# Altium PCB Carrier with Power Supply.PcbDoc (part 4 of 4)
Units mm, origin at the board's own origin, x right, y up, seen from the top; angles counter-clockwise.
Board outline 756.27 x 168 mm, 6 copper layers (Top Layer, Signal Layer 2, Signal Layer 1, VCC, GND, Bottom Layer), stack 1.551 mm thick; 145 components, 326 nets, 1962 pads, 760 vias.
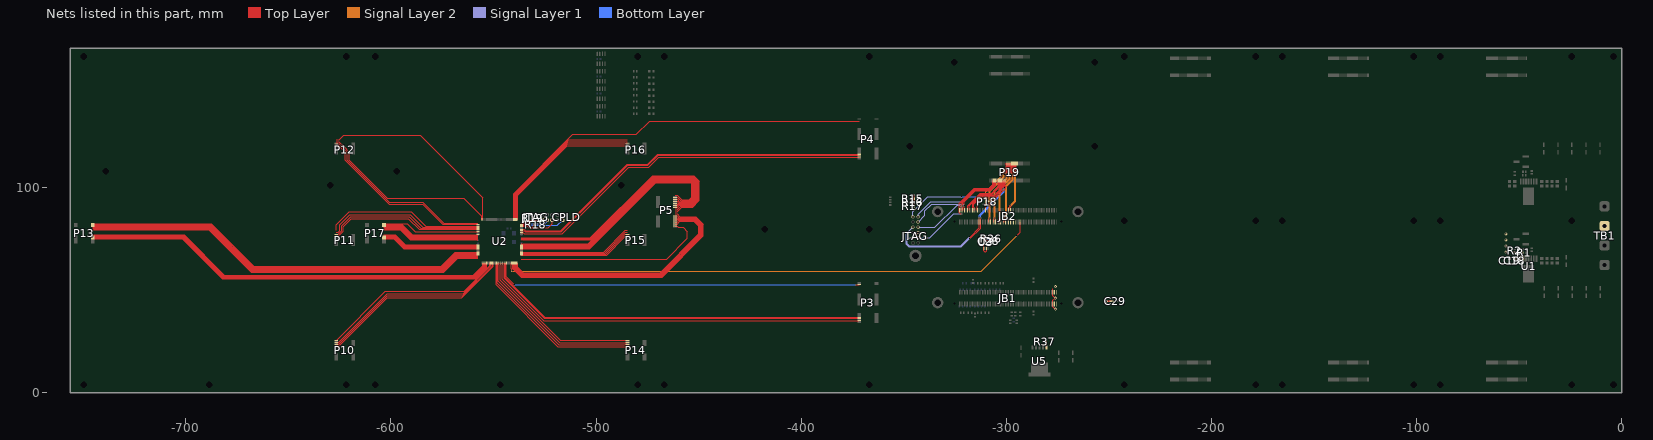
[diagram p8: the nets of this part, all layers, seen from the top]

## Via types
v1: diameter 0.5, hole 0.3, Top Layer to Bottom Layer, 213 vias
v2: diameter 0.9, hole 0.5, Top Layer to Bottom Layer, 182 vias
v3: diameter 0.7, hole 0.3, Top Layer to Bottom Layer, 112 vias
v4: diameter 1.1, hole 0.7, Top Layer to Bottom Layer, 84 vias
v5: diameter 1.5, hole 0.7, Top Layer to Bottom Layer, 59 vias
v6: diameter 1.7, hole 0.7, Top Layer to Bottom Layer, 58 vias
v7: diameter 0.8, hole 0.3, Top Layer to Bottom Layer, 36 vias
v8: diameter 0.9, hole 0.3, Top Layer to Bottom Layer, 6 vias
v9: diameter 1, hole 0.5, Top Layer to Bottom Layer, 4 vias
v10: diameter 1.1, hole 0.5, Top Layer to Bottom Layer, 4 vias
v11: diameter 0.7, hole 0.5, Top Layer to Bottom Layer, 1 vias
v12: diameter 1.3, hole 0.7, Top Layer to Bottom Layer, 1 vias

## Nets (pads, with @x,y where several pads share a name; then routed paths per layer and width w, separated by ;. In a path a pad name is that pad's centre, name@x,y a point inside that pad or via, vN(x,y) a via of type N, cw(c..) or ccw(c..) an arc to the next point about the centre after c; other vN are vias at no path point) (continued)
NetR37_1: R37.1 U5.1 | length 2.8
  Top Layer w0.3: R37.1@-280.53,24.89 -280.43,24.79 U5.1@-280.43,22.15
NRST_IN: JTAG.11 P18.2 P19.50 | length 58.1
  Top Layer w0.25: v1(-309.37,93.34) P18.2@-307.96,93.34 -306.862,93.34 -300.345,99.857 -300.345,100.625 -300.52,100.8 P19.50@-300.52,103.523
  Signal Layer 1 w0.4: JTAG.11@-345.527,85.868 -345.527,88.393 -338.22,95.7 v1(-321.88,95.7)
  Bottom Layer w0.25: v1(-321.88,95.7) -311.73,95.7 v1(-309.37,93.34)
OTG_ID: JB2.109 P19.64 | length 23.9
  Top Layer w0.3: JB2.109@-318.837,89.056 -318.837,91.243 -312.77,97.31 -307.16,97.31 -304.18,100.29 -304.18,100.63 -304.02,100.79 P19.64@-304.02,103.523
OTGD_N: JB2.103 P19.60 | length 23.7
  Top Layer w0.3: JB2.103@-316.437,89.056 -316.437,90.342 -316.287,90.492 -316.287,92.303 -312.28,96.31 -305.978,96.31 -303.22,99.068 -303.22,99.836 -303.18,99.876 -303.18,100.216 -303.02,100.376 P19.60@-303.02,103.523
OTGD_P: JB2.101 P19.58 | length 23.7
  Top Layer w0.3: JB2.101@-315.637,89.056 -315.637,90.342 -315.787,90.492 -315.787,92.095 -312.073,95.81 -305.771,95.81 -302.72,98.86 -302.72,99.628 -302.68,99.668 -302.68,100.009 -302.52,100.169 P19.58@-302.52,103.523
PD1: P3.75 U2.129 | length 190.3
  Top Layer w0.25: U2.129@-545.697,63.311 -545.697,55.454 -525.541,35.298 P3.75@-371.61,35.298
PD2: P4.75 U2.27 | length 180.4
  Top Layer w0.25: U2.27@-536.33,78.178 -535.494,78.178 -534.924,77.608 -516.55,77.608 -484.067,110.091 -474.247,110.091 -469.36,114.978 P4.75@-371.61,114.978
PHY_LED0: JB2.59 P19.27 | length 25
  Top Layer w0.3: v1(-295.091,106.588) -295.02,106.659 P19.27@-295.02,111.823 P19.27@-295.02,111.918
  Top Layer w0.4: JB2.59@-298.837,89.056 -298.835,89.059 v1(-298.835,90.848)
  Signal Layer 2 w0.3: v1(-298.835,90.848) -297.949,90.848 -295.427,93.369 -295.427,106.126 -295.091,106.462 v1(-295.091,106.588)
PHY_LED1: JB2.57 P19.29 | length 23.9
  Top Layer w0.3: JB2.57@-298.037,89.056 v1(-298.037,91.608) ; v1(-295.814,106.588) -295.814,107.477 -295.52,107.77 P19.29@-295.52,111.918
  Signal Layer 2 w0.3: v1(-298.037,91.608) -295.936,93.709 -295.936,106.465 v1(-295.814,106.588)
PHY_MDI0_N: JB2.82 P19.43 | length 32.3
  Top Layer w0.3: v1(-300.872,106.588) -300.872,107.368 -299.02,109.22 P19.43@-299.02,111.918
  Top Layer w0.4: JB2.82@-307.637,83.328 v1(-307.637,85.318)
  Signal Layer 2 w0.3: v1(-307.637,85.318) -307.787,85.468 -307.787,98.383 -300.96,105.21 -300.96,106.5 v1(-300.872,106.588)
PHY_MDI0_P: JB2.84 P19.45 | length 32.4
  Top Layer w0.3: v1(-301.594,106.588) -301.594,107.353 -299.52,109.427 P19.45@-299.52,111.918
  Top Layer w0.4: JB2.84@-308.437,83.328 v1(-308.437,85.318)
  Signal Layer 2 w0.3: v1(-308.437,85.318) -308.287,85.468 -308.287,98.59 -301.476,105.401 -301.476,106.47 v1(-301.594,106.588)
PHY_MDI1_N: JB2.76 P19.39 | length 31.7
  Top Layer w0.3: v1(-299.426,106.588) -299.426,107.399 -298.02,108.806 P19.39@-298.02,111.918
  Top Layer w0.4: JB2.76@-305.237,83.328 v1(-305.237,85.318)
  Signal Layer 2 w0.3: v1(-305.237,85.318) -305.387,85.468 -305.387,98.683 -299.56,104.51 -299.56,105.96 -299.549,105.971 -299.549,106.465 v1(-299.426,106.588)
PHY_MDI1_P: JB2.78 P19.41 | length 31.8
  Top Layer w0.3: v1(-300.149,106.588) -300.149,107.384 -298.52,109.013 P19.41@-298.52,111.918
  Top Layer w0.4: JB2.78@-306.037,83.328 v1(-306.037,85.318)
  Signal Layer 2 w0.3: v1(-306.037,85.318) -305.887,85.468 -305.887,98.89 -300.06,104.717 -300.06,106.499 v1(-300.149,106.588)
PHY_MDI2_N: JB2.70 P19.35 | length 31.1
  Top Layer w0.3: v1(-297.981,106.588) -297.981,107.43 -297.02,108.391 P19.35@-297.02,111.918
  Top Layer w0.4: JB2.70@-302.837,83.328 v1(-302.837,85.318)
  Signal Layer 2 w0.3: v1(-302.837,85.318) -302.987,85.468 -302.987,99.363 -302.227,100.123 -302.227,100.127 -301.876,100.478 -301.872,100.478 -298.06,104.29 -298.06,106.509 v1(-297.981,106.588)
PHY_MDI2_P: JB2.72 P19.37 | length 31.2
  Top Layer w0.3: v1(-298.704,106.588) -298.704,107.415 -297.52,108.598 P19.37@-297.52,111.918
  Top Layer w0.4: JB2.72@-303.637,83.328 v1(-303.637,85.318)
  Signal Layer 2 w0.3: v1(-303.637,85.318) -303.487,85.468 -303.487,99.57 -302.727,100.33 -302.727,100.334 -302.083,100.978 -302.079,100.978 -298.56,104.497 -298.56,105.96 -298.581,105.981 -298.581,106.465 v1(-298.704,106.588)
PHY_MDI3_N: JB2.64 P19.31 | length 30.5
  Top Layer w0.3: v1(-296.536,106.588) -296.52,106.604 -296.52,107.477 -296.02,107.977 P19.31@-296.02,111.918
  Top Layer w0.4: JB2.64@-300.437,83.328 v1(-300.437,85.318)
  Signal Layer 2 w0.3: v1(-300.437,85.318) -300.587,85.468 -299.81,86.245 -299.81,100.77 -296.63,103.95 -296.63,106.494 v1(-296.536,106.588)
PHY_MDI3_P: JB2.66 P19.33 | length 30.7
  Top Layer w0.3: v1(-297.259,106.588) -297.259,107.446 -296.52,108.184 P19.33@-296.52,111.918
  Top Layer w0.4: JB2.66@-301.237,83.328 v1(-301.237,85.318)
  Signal Layer 2 w0.3: v1(-301.237,85.318) -301.087,85.468 -301.087,85.675 -300.31,86.453 -300.31,100.977 -300.25,101.037 -297.13,104.157 -297.13,105.99 -297.136,105.996 -297.136,106.465 v1(-297.259,106.588)
RESET_ADC1: P3.5 U2.133 | length 180.4
  Top Layer w0.25: U2.133@-543.697,63.311 -543.697,56.621 v3(-539.874,52.798) ; v1(-373.32,52.798) P3.5@-371.61,52.798
  Bottom Layer w0.25: v3(-539.874,52.798) v1(-373.32,52.798)
RESET_ADC2: P4.5 U2.41 | length 195.8
  Top Layer w0.25: U2.41@-540.197,84.545 -540.197,97.079 -511.264,126.012 -480.316,126.012 -473.85,132.478 P4.5@-371.61,132.478
SCLK1: P3.69 U2.132 | length 187.8
  Top Layer w0.25: U2.132@-544.197,63.311 -544.197,56.075 -524.92,36.798 P3.69@-371.61,36.798
SCLK2: P4.69 U2.30 | length 180.5
  Top Layer w0.25: U2.30@-536.33,79.678 -535.085,79.678 -534.44,79.033 -517.246,79.033 -484.688,111.591 -474.869,111.591 -469.982,116.478 P4.69@-371.61,116.478
SDA1: P3.71 U2.131 | length 188.6
  Top Layer w0.25: U2.131@-544.697,63.311 -544.697,55.868 -525.127,36.298 P3.71@-371.61,36.298
SDA2: P4.71 U2.29 | length 180.5
  Top Layer w0.25: U2.29@-536.33,79.178 -536.295,79.143 -535.186,79.143 -534.577,78.533 -517.039,78.533 -484.481,111.091 -474.662,111.091 -469.775,115.978 P4.71@-371.61,115.978
SDDET: JB2.87 P19.47 | length 27
  Top Layer w0.3: JB2.87@-310.037,89.056 v1(-310.037,90.933) ; v1(-302.317,106.588) -302.317,107.345 -300.02,109.642 P19.47@-300.02,111.918
  Signal Layer 2 w0.3: v1(-310.037,90.933) -310.037,98.083 -302.317,105.803 v1(-302.317,106.588)
SIN_N: JB2.54
SIN_P: JB2.52
SOUT_N: JB2.60
SOUT_P: JB2.58
TCK: JB2.119 JTAG.4 P19.74 | length 54.2
  Top Layer w0.2: JB2.119@-322.837,89.056 -322.837,92.455 -315.613,99.68 -308.265,99.68 -306.52,101.425 P19.74@-306.52,103.523
  Top Layer w0.3: JB2.119@-322.837,89.056 -322.837,87.777 -322.34,87.28 v1(-321.73,87.28)
  Signal Layer 1 w0.3: JTAG.4@-342.987,75.708 -337.262,75.708 -325.69,87.28 v1(-321.73,87.28)
TCK_CPLD: "JTAG CPLD.1" R19.2 U2.35 | length 10.8
  Top Layer w0.3: U2.35@-536.33,82.178 -534.102,82.178 -532.03,84.25 R19.2@-530.73,84.25 -526.45,84.25 -526.44,84.26
TDI: JB2.115 JTAG.10 P19.70 | length 52.4
  Top Layer w0.2: JB2.115@-321.237,89.056 -321.237,92.924 -315.281,98.88 -307.934,98.88 -305.52,101.294 P19.70@-305.52,103.523
  Signal Layer 1 w0.3: JTAG.10@-342.987,83.328 -339.626,86.689 -339.626,88.886 -336.453,92.06 -322.23,92.06 v1(-321.23,91.06)
TDI_CPLD: "JTAG CPLD.9" U2.34 | length 21.1
  Top Layer w0.3: U2.34@-536.33,81.678 v3(-532.518,81.678)
  Bottom Layer w0.3: v3(-532.518,81.678) -518.862,81.678 -516.28,84.26
TDO: JB2.117 JTAG.8 P19.72 | length 51.2
  Top Layer w0.2: JB2.117@-322.037,89.056 v1(-322.037,90.65) -322.037,92.69 -315.447,99.28 -308.1,99.28 -306.02,101.359 P19.72@-306.02,103.523
  Signal Layer 1 w0.3: JTAG.8@-342.987,80.788 -334.752,80.788 -323.98,91.56 -322.947,91.56 v1(-322.037,90.65)
TDO_CPLD: "JTAG CPLD.3" U2.36 | length 14.1
  Top Layer w0.3: U2.36@-536.33,82.678 -535.052,82.678 v3(-534.55,83.18)
  Bottom Layer w0.3: v3(-534.55,83.18) -533.91,82.54 -524.79,82.54 -523.9,83.43 -523.9,84.26
TMS: JB2.113 JTAG.12 P19.68 | length 52.2
  Top Layer w0.2: JB2.113@-320.437,89.056 v1(-320.437,91.5) -320.437,93.158 -315.116,98.48 -307.768,98.48 -305.07,101.178 -305.07,103.473 P19.68@-305.02,103.523
  Signal Layer 1 w0.3: JTAG.12@-342.987,85.868 -342.987,87.143 -336.93,93.2 -322.137,93.2 v1(-320.437,91.5)
TMS_CPLD: "JTAG CPLD.5" R18.2 U2.33 | length 19.8
  Top Layer w0.3: U2.33@-536.33,81.178 -536.32,81.167 -533.199,81.167 -532.68,80.648 -531.42,80.648 ; R18.2@-530.06,81.768 R18.2@-530.06,81.918 -530.15,81.918 -531.42,80.648 ; -521.36,84.26 -521.36,82.5 -523.212,80.648 -531.42,80.648
TRIP1: P5.72 U2.1 | length 95.5
  Top Layer w0.25: U2.1@-536.33,65.178 -466.06,65.178 -466.01,65.228 -465.824,65.228 -465.774,65.278 -465.587,65.278 -455.46,75.405 -455.46,78.688 -457.547,80.775 -459.891,80.775 -460.441,81.325 P5.72@-461.466,81.325
TRIP2: P5.28 U2.15 | length 117.7
  Top Layer w0.25: U2.15@-536.33,72.178 -503.706,72.178 -471.686,104.198 -453.144,104.198 -451.44,102.494 -451.44,94.581 -453.696,92.325 P5.28@-461.466,92.325
TRIP3: P5.68 U2.144 | length 116.1
  Top Layer w0.25: U2.144@-538.197,63.311 -538.197,61.335 -535.54,58.678 -468.75,58.678 -449.86,77.568 -449.86,81.21 -452.35,83.7 -459.066,83.7 -460.441,82.325 P5.68@-461.466,82.325
TRIP4: P5.32 U2.16 | length 119.4
  Top Layer w0.25: U2.16@-536.33,72.678 -503.842,72.678 -471.872,104.648 -452.958,104.648 -450.99,102.68 -450.99,94.394 -453.509,91.875 -459.891,91.875 -460.441,91.325 P5.32@-461.466,91.325
TRIP5: P5.64 U2.143 | length 118.1
  Top Layer w0.25: U2.143@-538.697,63.311 -538.697,61.199 -535.726,58.228 -468.564,58.228 -449.41,77.382 -449.41,81.396 -452.164,84.15 -459.616,84.15 -460.441,83.325 P5.64@-461.466,83.325
TRIP6: P5.36 U2.20 | length 120.5
  Top Layer w0.25: U2.20@-536.33,74.678 -502.479,74.678 -472.058,105.098 -452.772,105.098 -450.54,102.866 -450.54,94.208 -453.323,91.425 -459.341,91.425 -460.441,90.325 P5.36@-461.466,90.325
TRIP7: P5.60 U2.142 | length 120.1
  Top Layer w0.25: U2.142@-539.197,63.311 -539.197,61.071 -539.19,61.064 -539.19,61.055 -535.913,57.778 -468.377,57.778 -448.96,77.195 -448.96,81.583 -451.977,84.6 -460.166,84.6 -460.441,84.325 P5.60@-461.466,84.325
TRIP8: P5.40 U2.21 | length 122.2
  Top Layer w0.25: U2.21@-536.33,75.178 -502.615,75.178 -472.245,105.548 -452.585,105.548 -450.09,103.053 -450.09,94.022 -453.137,90.975 -458.791,90.975 -460.441,89.325 P5.40@-461.466,89.325
TRIP9: P5.44 U2.22 | length 123.9
  Top Layer w0.25: U2.22@-536.33,75.678 -502.751,75.678 -472.431,105.998 -452.399,105.998 -449.64,103.239 -449.64,93.835 -452.95,90.525 -458.241,90.525 -460.441,88.325 P5.44@-461.466,88.325
TRIP10: P5.16 U2.12 | length 114
  Top Layer w0.25: U2.12@-536.33,70.678 -503.297,70.678 -471.126,102.848 -453.704,102.848 -452.79,101.934 -452.79,95.14 -454.255,93.675 -458.791,93.675 -460.441,95.325 P5.16@-461.466,95.325
TRIP11: P5.48 U2.139 | length 127.4
  Top Layer w0.25: U2.139@-540.697,63.311 -540.697,60.661 -540.54,60.504 -540.54,60.496 -536.472,56.428 -467.818,56.428 -447.61,76.636 -447.61,82.142 -451.418,85.95 -459.066,85.95 -460.441,87.325 P5.48@-461.466,87.325
TRIP12: P5.12 U2.11 | length 112.8
  Top Layer w0.25: U2.11@-536.33,70.178 -503.16,70.178 -470.94,102.398 -453.89,102.398 -453.24,101.748 -453.24,95.328 -454.443,94.125 -458.241,94.125 -460.441,96.325 P5.12@-461.466,96.325
TRIP13: P5.52 U2.140 | length 124.9
  Top Layer w0.25: U2.140@-540.197,63.311 -540.197,60.798 -540.09,60.691 -540.09,60.682 -536.286,56.878 -468.004,56.878 -448.06,76.822 -448.06,81.956 -451.604,85.5 -459.616,85.5 -460.441,86.325 P5.52@-461.466,86.325
TRIP14: P5.20 U2.13 | length 115.2
  Top Layer w0.25: U2.13@-536.33,71.178 -503.433,71.178 -471.313,103.298 -453.517,103.298 -452.34,102.121 -452.34,94.954 -454.069,93.225 -459.341,93.225 -460.441,94.325 P5.20@-461.466,94.325
TRIP15: P5.56 U2.141 | length 122.4
  Top Layer w0.25: U2.141@-539.697,63.311 -539.697,60.934 -539.64,60.877 -539.64,60.869 -536.099,57.328 -468.191,57.328 -448.51,77.009 -448.51,81.769 -451.791,85.05 -460.166,85.05 -460.441,85.325 P5.56@-461.466,85.325
TRIP16: P5.24 U2.14 | length 116.5
  Top Layer w0.25: U2.14@-536.33,71.678 -503.569,71.678 -471.499,103.748 -453.331,103.748 -451.89,102.307 -451.89,94.767 -453.882,92.775 -459.891,92.775 -460.441,93.325 P5.24@-461.466,93.325
TRIP17: P11.1 U2.76 | length 77.4
  Top Layer w0.25: P11.1@-626.69,79.304 -626.69,81.958 -620.31,88.338 -590.15,88.338 -582.99,81.178 U2.76@-557.564,81.178
TRIP18: P11.5 U2.77 | length 77
  Top Layer w0.25: P11.5@-626.69,78.304 -625.614,78.304 -624.92,78.998 -624.92,81.978 -619.977,86.921 -590.665,86.921 -584.422,80.678 U2.77@-557.564,80.678
TRIP19: P11.9 U2.78 | length 76.6
  Top Layer w0.25: P11.9@-626.69,77.304 -625.665,77.304 -623.99,78.979 -623.99,81.558 -619.627,85.921 -591.079,85.921 -585.336,80.178 U2.78@-557.564,80.178
TRIP20: P11.13 U2.79 | length 76.2
  Top Layer w0.25: P11.13@-626.69,76.304 -625.665,76.304 -623.21,78.759 -623.21,81.048 -619.337,84.921 -591.493,84.921 -586.25,79.678 U2.79@-557.564,79.678
TRIP21: P13.2 U2.101 | length 199.3
  Top Layer w0.25: P13.2@-745.364,82.569 -687.515,82.569 -666.737,61.791 -575.407,61.791 -568.521,68.678 U2.101@-557.564,68.678
TRIP22: P13.4 U2.102 | length 199.3
  Top Layer w0.25: P13.4@-745.364,82.069 -687.723,82.069 -666.945,61.291 -575.2,61.291 -568.314,68.178 U2.102@-557.564,68.178
TRIP23: P13.6 U2.103 | length 199.3
  Top Layer w0.25: P13.6@-745.364,81.569 -687.93,81.569 -667.152,60.791 -574.993,60.791 -568.106,67.678 U2.103@-557.564,67.678
TRIP24: P13.8 U2.104 | length 199.3
  Top Layer w0.25: P13.8@-745.364,81.069 -688.137,81.069 -667.359,60.291 -574.786,60.291 -567.899,67.178 U2.104@-557.564,67.178
TRIP25: P13.10 U2.105 | length 199.3
  Top Layer w0.25: P13.10@-745.364,80.569 -688.344,80.569 -667.566,59.791 -574.579,59.791 -567.692,66.678 U2.105@-557.564,66.678
TRIP26: P13.12 U2.106 | length 199.3
  Top Layer w0.25: P13.12@-745.364,80.069 -688.551,80.069 -667.773,59.291 -574.372,59.291 -567.485,66.178 U2.106@-557.564,66.178
TRIP27: P13.14 U2.107 | length 199.3
  Top Layer w0.25: P13.14@-745.364,79.569 -688.758,79.569 -667.98,58.791 -574.165,58.791 -567.278,65.678 U2.107@-557.564,65.678
TRIP28: P13.24 U2.110 | length 201.5
  Top Layer w0.25: P13.24@-745.364,77.069 -700.803,77.069 -681.125,57.391 -559.86,57.391 -555.197,62.054 U2.110@-555.197,63.311
TRIP29: P13.26 U2.111 | length 202.3
  Top Layer w0.25: P13.26@-745.364,76.569 -701.01,76.569 -681.382,56.941 -559.603,56.941 -554.697,61.847 U2.111@-554.697,63.311
TRIP30: P13.28 U2.112 | length 203.1
  Top Layer w0.25: P13.28@-745.364,76.069 -701.217,76.069 -681.639,56.491 -559.346,56.491 -554.197,61.64 U2.112@-554.197,63.311
TRIP31: P13.30 U2.113 | length 203.9
  Top Layer w0.25: P13.30@-745.364,75.569 -701.424,75.569 -681.896,56.041 -559.089,56.041 -553.697,61.433 U2.113@-553.697,63.311
TRIP32: P13.32 U2.114 | length 204.7
  Top Layer w0.25: P13.32@-745.364,75.069 -701.631,75.069 -682.153,55.591 -558.832,55.591 -553.197,61.226 U2.114@-553.197,63.311
TRIP33: P10.1 U2.117 | length 91.3
  Top Layer w0.25: P10.1@-626.69,25.554 -602.783,49.461 -564.326,49.461 -551.697,62.09 U2.117@-551.697,63.311
TRIP34: P10.5 U2.118 | length 92.3
  Top Layer w0.25: P10.5@-626.69,24.554 -625.665,24.554 -601.758,48.461 -564.689,48.461 -551.197,61.953 U2.118@-551.197,63.311
TRIP35: P10.9 U2.119 | length 93.3
  Top Layer w0.25: P10.9@-626.69,23.554 -625.665,23.554 -601.758,47.461 -565.053,47.461 -550.697,61.817 U2.119@-550.697,63.311
TRIP36: P10.13 U2.120 | length 94.3
  Top Layer w0.25: P10.13@-626.69,22.554 -625.665,22.554 -601.758,46.461 -565.416,46.461 -550.197,61.68 U2.120@-550.197,63.311
TRIP37: P12.1 U2.71 | length 95.7
  Top Layer w0.25: P12.1@-626.69,123.408 -625.22,123.408 -623.015,125.613 -585.595,125.613 -555.197,95.215 U2.71@-555.197,84.545
TRIP38: P12.5 U2.72 | length 89.9
  Top Layer w0.25: P12.5@-626.69,122.408 -625.308,122.408 -623.334,120.434 -620.277,117.377 -620.277,113.421 -601.734,94.878 -584.937,94.878 -564.45,94.878 -555.697,86.125 U2.72@-555.697,84.545
TRIP39: P12.9 U2.73 | length 87.5
  Top Layer w0.25: P12.9@-626.69,121.408 -625.308,121.408 -621.277,117.377 -621.277,113.421 -600.794,92.938 -584.447,92.938 -574.187,82.678 U2.73@-557.564,82.678
TRIP40: P12.13 U2.74 | length 87.3
  Top Layer w0.25: P12.13@-626.69,120.408 -625.308,120.408 -622.277,117.377 -622.277,113.421 -600.794,91.938 -584.447,91.938 -574.687,82.178 U2.74@-557.564,82.178
TRIP41: P17.2 U2.81 | length 47.4
  Top Layer w0.25: P17.2@-603.364,82.569 -592.119,82.569 -588.228,78.678 U2.81@-557.564,78.678
TRIP42: P17.4 U2.84 | length 47.8
  Top Layer w0.25: P17.4@-603.364,82.069 -594.39,82.069 -589.499,77.178 U2.84@-557.564,77.178
TRIP43: P17.6 U2.85 | length 47.8
  Top Layer w0.25: P17.6@-603.364,81.569 -594.597,81.569 -589.706,76.678 U2.85@-557.564,76.678
TRIP44: P17.8 U2.86 | length 47.8
  Top Layer w0.25: P17.8@-603.364,81.069 -594.804,81.069 -589.913,76.178 U2.86@-557.564,76.178
TRIP45: P17.10 U2.87 | length 47.8
  Top Layer w0.25: P17.10@-603.364,80.569 -595.011,80.569 -590.12,75.678 U2.87@-557.564,75.678
TRIP46: P17.12 U2.88 | length 47.8
  Top Layer w0.25: P17.12@-603.364,80.069 -595.218,80.069 -590.327,75.178 U2.88@-557.564,75.178
TRIP47: P17.14 U2.89 | length 47.8
  Top Layer w0.25: P17.14@-603.364,79.569 -595.425,79.569 -590.534,74.678 U2.89@-557.564,74.678
TRIP48: P17.24 U2.94 | length 47.8
  Top Layer w0.25: P17.24@-603.364,77.069 -597.883,77.069 -592.991,72.178 U2.94@-557.564,72.178
TRIP49: P17.26 U2.95 | length 47.8
  Top Layer w0.25: P17.26@-603.364,76.569 -598.09,76.569 -593.198,71.678 U2.95@-557.564,71.678
TRIP50: P17.28 U2.96 | length 47.8
  Top Layer w0.25: P17.28@-603.364,76.069 -598.297,76.069 -593.406,71.178 U2.96@-557.564,71.178
TRIP51: P17.30 U2.97 | length 47.8
  Top Layer w0.25: P17.30@-603.364,75.569 -598.504,75.569 -593.613,70.678 U2.97@-557.564,70.678
TRIP52: P17.32 U2.98 | length 47.8
  Top Layer w0.25: P17.32@-603.364,75.069 -598.711,75.069 -593.82,70.178 U2.98@-557.564,70.178
TRIP53: P15.1 U2.8 | length 56
  Top Layer w0.25: U2.8@-536.33,68.678 -496.341,68.678 -485.715,79.304 P15.1@-484.69,79.304
TRIP54: P14.1 U2.127 | length 82.6
  Top Layer w0.25: U2.127@-546.697,63.311 -546.697,54.885 -517.491,25.679 -484.815,25.679 P14.1@-484.69,25.554
TRIP55: P14.5 U2.125 | length 84.2
  Top Layer w0.25: U2.125@-547.697,63.311 -547.697,54.471 -517.78,24.554 P14.5@-484.69,24.554
TRIP56: P14.9 U2.124 | length 85.7
  Top Layer w0.25: U2.124@-548.197,63.311 -548.197,53.557 -518.194,23.554 P14.9@-484.69,23.554
TRIP57: P14.13 U2.123 | length 87.1
  Top Layer w0.25: U2.123@-548.697,63.311 -548.697,52.642 -518.609,22.554 P14.13@-484.69,22.554
TRIP58: P16.1 U2.40 | length 78.4
  Top Layer w0.25: U2.40@-539.697,84.545 -539.697,96.942 -513.231,123.408 P16.1@-484.69,123.408
TRIP59: P16.5 U2.39 | length 77.3
  Top Layer w0.25: U2.39@-539.197,84.545 -539.197,96.735 -513.524,122.408 P16.5@-484.69,122.408
TRIP60: P16.9 U2.38 | length 76.3
  Top Layer w0.25: U2.38@-538.697,84.545 -538.697,96.528 -513.817,121.408 P16.9@-484.69,121.408
TRIP61: P16.13 U2.37 | length 75.3
  Top Layer w0.25: U2.37@-538.197,84.545 -538.197,96.321 -514.11,120.408 P16.13@-484.69,120.408
TRIP62: P15.5 U2.7 | length 55.8
  Top Layer w0.25: U2.7@-536.33,68.178 -495.841,68.178 -485.715,78.304 P15.5@-484.69,78.304
TRIP63: P15.9 U2.6 | length 55.6
  Top Layer w0.25: U2.6@-536.33,67.678 -495.341,67.678 -485.715,77.304 P15.9@-484.69,77.304
TRIP64: P15.13 U2.5 | length 55.4
  Top Layer w0.25: U2.5@-536.33,67.178 -494.841,67.178 -485.715,76.304 P15.13@-484.69,76.304
TRIP_GEN: JB2.46 U2.138 | length 264.6
  Top Layer w0.25: U2.138@-541.197,63.311 -541.197,60.525 -540.99,60.318 v3(-540.99,59.398)
  Top Layer w0.4: v2(-294.915,76.655) -293.237,78.333 JB2.46@-293.237,83.328
  Signal Layer 2 w0.5: v3(-540.99,59.398) -312.172,59.398 v2(-294.915,76.655)
USART0_RX: JB2.94 JTAG.7 P19.52 | length 78.1
  Top Layer w0.3: v1(-317.79,75.35) -317.45,75.35 -312.537,80.262 -312.537,81.941 -312.437,82.041 JB2.94@-312.437,83.328 ; P19.52@-301.02,103.523 -301.02,100.303 v1(-300.92,100.203)
  Top Layer w0.4: JB2.94@-312.437,83.328 v1(-312.437,85.318)
  Signal Layer 1 w0.3: JTAG.7@-345.527,80.788 -348.72,77.595 -348.72,72.473 -347.527,71.28 -321.86,71.28 v1(-317.79,75.35)
  Bottom Layer w0.3: v1(-312.437,85.318) -312.437,86.608 -300.92,98.125 v1(-300.92,100.203)
USART0_TX: JB2.96 JTAG.3 P19.54 | length 72
  Top Layer w0.3: v1(-317.85,76.22) -317.357,76.22 -313.087,80.49 -313.087,81.891 -313.237,82.041 JB2.96@-313.237,83.328 ; v1(-301.58,99.553) -301.52,99.613 P19.54@-301.52,103.523
  Top Layer w0.4: JB2.96@-313.237,83.328 v1(-313.237,85.318)
  Signal Layer 1 w0.3: JTAG.3@-345.527,75.708 -347.092,75.708 -348.17,74.63 -348.17,72.63 -347.37,71.83 -322.24,71.83 v1(-317.85,76.22)
  Bottom Layer w0.3: v1(-313.237,85.318) -313.237,86.718 -301.58,98.375 v1(-301.58,99.553)
USB_OC: P19.25
USB_VBUS: JB2.107 P19.62 | length 23.8
  Top Layer w0.3: JB2.107@-318.037,89.056 -318.037,91.323 -312.55,96.81 -306.953,96.81 -303.68,100.083 -303.68,100.423 -303.52,100.583 P19.62@-303.52,103.523
VBUS_EN: JB2.97 P19.56 | length 23.1
  Top Layer w0.3: JB2.97@-314.037,89.056 -314.037,93.138 -311.931,95.245 -305.629,95.245 -302.17,98.703 -302.17,99.294 -302.18,99.304 -302.18,99.802 -302.02,99.962 P19.56@-302.02,103.523
VIN33: C18.2 C19.2 C28.1 C29.1 JB1.1 JB1.2 JB1.3 JB1.4 JB1.5 JB1.6 JTAG.6 R1.2 R2.1 R15.2 R16.2 R17.2 R36.1 TB1.3 U1.6 U1.7 U3.1 U3.3 U3.8 | length 36.3
  Top Layer w0.3: U3.8@-310.895,76.33 -310.895,73.49 U3.1@-310.895,70.53 -310.895,69.345 -310.49,68.94 -309.9,68.94 -309.595,69.245 U3.3@-309.595,70.53
  Top Layer w0.4: -277.27,50.82 -277.237,50.787 JB1.5@-277.237,49.056 -277.237,47.368 v5(-276.107,46.238) -277.237,45.108 JB1.6@-277.237,43.328 -277.237,42.008 v5(-276.107,40.878)
  Top Layer w0.5: R17.2@-344.83,91.08 R16.2@-344.83,92.85 R15.2@-344.83,94.59 v2(-344.83,96.56) ; v3@-310.895,73.49 -309.947,74.438 R36.1@-307.25,74.438
  Top Layer w0.65: v5(-251.167,44.628) C29.1@-248.647,44.628
  Bottom Layer w0.5: v3@-310.95,73.52 -309.751,74.719 C28.1@-308.437,74.719
  other v3: -310.91,73.49
  other v5: -276.107,51.828 -56.457,68.689 -56.457,71.646 -56.457,74.602 -56.457,77.559
pads on no net: "JTAG CPLD.6" "JTAG CPLD.7" "JTAG CPLD.8" JB1. JB1.65 JB1.66 JB2. JB2.13 JB2.18 JB2.30 JB2.49 JB2.118 JTAG.5 JTAG.H1 P1.2 P1.6 P1.10 P1.14 P1.18 P1.22 P1.26 P1.28 P1.30 P1.32 P1.34 P1.38 P1.39 P1.40 P1.41 P1.42 P1.46 P1.48 P1.50 P1.52 P1.54 P1.58 P1.62 P1.66 P1.70 P1.74 P1.78 P1.80 P2.1 P2.3 P2.5 P2.7 P2.9 P2.13 P2.17 P2.21 P2.25 P2.29 P2.33 P2.35 P2.37 P2.39 P2.40 P2.41 P2.42 P2.43 P2.45 P2.47 P2.49 P2.51 P2.53 P2.57 P2.61 P2.65 P2.69 P2.73 P2.77 P2.79 P3.1 P3.3 P3.77 P3.79 P4.1 P4.3 P4.77 P5.2 P5.4 P5.6 P5.8 P5.10 P5.14 P5.62 P5.66 P5.70 P5.74 P5.78 P6.2 P6.6 P6.10 P6.14 P6.18 P6.22 P6.26 P6.28 P6.30 P6.32 P6.34 P6.38 P6.39 P6.40 P6.41 P6.42 P6.46 P6.48 P6.50 P6.52 P6.54 P6.58 P6.62 P6.66 P6.70 P6.74 P6.78 P6.80 P7.1 P7.3 P7.5 P7.7 P7.9 P7.13 P7.17 P7.21 P7.25 P7.29 P7.33 P7.35 P7.37 P7.39 P7.40 P7.41 P7.42 P7.43 P7.45 P7.47 P7.49 P7.51 P7.53 P7.57 P7.61 P7.65 P7.69 P7.73 P7.77 P7.79 P8.2 P8.6 P8.10 P8.14 P8.18 P8.22 P8.26 P8.28 P8.30 P8.32 P8.34 P8.38 P8.39 P8.40 P8.41 P8.42 P8.46 P8.48 P8.50 P8.52 P8.54 P8.58 P8.62 P8.66 P8.70 P8.74 P8.78 P8.80 P9.1 P9.3 P9.5 P9.7 P9.9 P9.11 P9.13 P9.17 P9.21 P9.25 P9.29 P9.33 P9.35 P9.37 P9.39 P9.40 P9.41 P9.42 P9.43 P9.45 P9.47 P9.49 P9.51 P9.53 P9.57 P9.61 P9.65 P9.69 P9.73 P9.77 P9.79 P10.3 P10.7 P10.11 P10.17 P10.21 P11.3 P11.7 P11.11 P11.17 P11.21 P11.23 P11.31 P11.39 P12.3 P12.7 P12.11 P12.17 P12.21 P12.23 P12.31 P12.39 P13.20 P13.22 P13.34 P13.36 P13.38 P13.40 P14.3 P14.7 P14.11 P14.15 P14.21 P15.3 P15.7 P15.11 P15.15 P15.21 P15.23 P15.31 P15.39 P16.3 P16.7 P16.11 P16.15 P16.21 P16.23 P16.31 P16.39 P17.16 P17.18 P17.34 P17.36 P17.38 P17.40 P19.2 P19.4 P19.6 P19.8 P19.10 P19.12 P19.14 P19.16 P19.18 P19.20 P19.22 P19.28 P19.30 P19.32 P19.34 P19.36 P19.38 P19.40 P19.42 P19.44 P19.46 P19.48 P19.49 P19.67 P19.69 P19.71 P19.73 P20.41 S1.4 U2.32 U2.53 U2.55 U2.57 U2.58 U2.59 U2.60 U2.61 U2.62 U2.63 U2.66 U2.67 U2.68 U2.69 U2.70 U3.0

## Polygon pours and split planes (outlines as drawn)
GND on Top Layer "Plano_entrada2_+5V" (solid, remove dead copper, pour order 120): -40.537,119.42 -7.877,119.42 -6.247,121.05 -5.627,121.67 -5.627,124.71 -5.627,128.83 -7.727,130.93 -41.237,130.93 -42.327,129.84 -42.327,121.21
+5V on Top Layer "Plano_entrada2_+5V" (solid, remove dead copper, pour order 118): -7.007,48.69 -56.697,48.69 -58.177,47.21 -58.177,38.79 -56.767,37.38 -7.217,37.38 -5.527,39.07 -5.527,47.21
+2.5V on Top Layer "+2.5V Plano_TOP" (solid, pour order 42): -284.71,24.28 -284.71,25.75 -285.44,26.48 -296.1,26.48 -296.89,25.69 -296.89,21.08 -296.15,20.34 -285.25,20.34 -284.71,20.88 -284.71,21.09
GND on Top Layer "GND_referencia" (solid, pour order 40): -265.94,17.16 -281.41,17.16 -283.18,18.93 -283.29,19.04 -283.29,23.17 -284.35,23.17 -284.36,23.16 -284.36,20.39 -284.75,20 -296.05,20 -296.91,19.14 -296.91,4.99 -295.93,4.01 -265.86,4.01 -264.55,5.32 -264.55,15.77
+5V on Top Layer "+5V_In referencia" (solid, pour order 38): -264.44,22.19 -264.44,25.02 -265.83,26.41 -282.3,26.41 -282.82,25.89 -282.82,19.19 -281.33,17.7 -265.93,17.7 -264.44,19.19
+3.3V on Top Layer "Plano +3.3V_TopLayer" (solid, pour order 28): -48.767,106.868 -47.837,106.928 -47.457,106.548 -47.457,101.588 -47.737,101.308 -49.617,101.308 -50.477,102.168 -56.467,102.168 -58.307,104.008 -58.307,116.178 -56.017,118.468 -49.801,118.468 -49.067,117.734 -49.067,115.468 -49.067,107.168
+5V on Top Layer "Plano_entrada2_+5V" (solid, pour order 26): -5.277,103.788 -6.877,102.188 -32.217,102.188 -39.897,102.188 -40.707,101.378 -43.087,101.378 -43.387,101.678 -43.387,104.868 -42.367,105.888 -42.367,116.258 -40.377,118.248 -7.657,118.248 -5.277,115.868
GND on Top Layer "Plano_entrada2_GND" (solid, pour order 24): -6.857,101.788 -23.317,101.788 -39.707,101.788 -40.767,100.728 -44.077,100.728 -44.947,101.598 -45.827,101.598 -45.837,101.588 -46.657,100.768 -47.877,100.768 -49.797,100.768 -50.817,101.788 -56.507,101.788 -58.157,100.138 -58.157,89.718 -55.977,87.538 -29.732,87.538 -6.637,87.538 -5.357,88.818 -5.357,94.618 -5.357,100.288
GND on Top Layer "Plano_entrada_GND" (solid, pour order 20): -6.007,65.828 -14.737,65.828 -16.457,64.108 -24.957,64.108 -25.377,64.108 -25.377,56.858 -6.297,56.858 -5.357,57.798 -5.357,65.178
+5V on Top Layer "Plano_entrada_+5V" (solid, pour order 4): -6.247,74.928 -23.537,74.928 -25.357,73.108 -25.357,66.699 -25.357,64.658 -17.997,64.658 -14.857,67.798 -6.309,67.798 -5.297,68.809 -5.297,73.978
GND on Top Layer "GND_carrier_connector" (solid, pour order 2): -278.887,53.516 -278.107,53.516 -277.75,53.241 -277.75,40.365 -278.077,40.038 -279.607,40.028 -279.977,40.398 -279.977,53.216 -279.677,53.516
VIN33 on Top Layer "VIN33_carrier_connector" (solid, pour order 0): -276.487,53.516 -275.087,53.516 -274.637,53.066 -274.637,40.328 -274.937,40.028 -277.207,40.028 -277.487,40.308 -277.487,53.306 -277.277,53.516
+5V on Top Layer "+5V_TarjetaHija" (solid, pour order 48): -44.742,9.382 -45.33,9.97 -55.41,9.97 -56.09,9.29 -56.09,4.67 -55.74,4.32 -45.15,4.32 -44.742,4.728
+5V on Top Layer "+5V_TarjetaHija" (solid, pour order 50): -121.742,9.382 -122.33,9.97 -132.41,9.97 -133.09,9.29 -133.09,4.67 -132.74,4.32 -122.15,4.32 -121.742,4.728
+5V on Top Layer "+5V_TarjetaHija" (solid, pour order 52): -198.742,9.382 -199.33,9.97 -209.41,9.97 -210.09,9.29 -210.09,4.67 -209.74,4.32 -199.15,4.32 -198.742,4.728
+5V on Top Layer "+5V_TarjetaHija" (solid, pour order 54): -44.742,160.348 -45.33,159.76 -55.41,159.76 -56.09,160.44 -56.09,165.06 -55.74,165.41 -45.15,165.41 -44.742,165.002
+5V on Top Layer "+5V_TarjetaHija" (solid, pour order 56): -121.742,160.348 -122.33,159.76 -132.41,159.76 -133.09,160.44 -133.09,165.06 -132.74,165.41 -122.15,165.41 -121.742,165.002
+5V on Top Layer "+5V_TarjetaHija" (solid, pour order 58): -198.742,160.348 -199.33,159.76 -209.41,159.76 -210.09,160.44 -210.09,165.06 -209.74,165.41 -199.15,165.41 -198.742,165.002
GND on Top Layer "GND_TarjetaHija" (solid, pour order 60): -67.71,160.348 -67.122,159.76 -57.042,159.76 -56.362,160.44 -56.362,165.06 -56.712,165.41 -67.302,165.41 -67.71,165.002
GND on Top Layer "GND_TarjetaHija" (solid, pour order 62): -144.71,160.348 -144.122,159.76 -134.042,159.76 -133.362,160.44 -133.362,165.06 -133.712,165.41 -144.302,165.41 -144.71,165.002
GND on Top Layer "GND_TarjetaHija" (solid, pour order 64): -221.71,160.348 -221.122,159.76 -211.042,159.76 -210.362,160.44 -210.362,165.06 -210.712,165.41 -221.302,165.41 -221.71,165.002
GND on Top Layer "GND_TarjetaHija" (solid, pour order 66): -67.71,9.382 -67.122,9.97 -57.042,9.97 -56.362,9.29 -56.362,4.67 -56.712,4.32 -67.302,4.32 -67.71,4.728
GND on Top Layer "GND_TarjetaHija" (solid, pour order 68): -144.71,9.382 -144.122,9.97 -134.042,9.97 -133.362,9.29 -133.362,4.67 -133.712,4.32 -144.302,4.32 -144.71,4.728
GND on Top Layer "GND_TarjetaHija" (solid, pour order 70): -221.71,9.382 -221.122,9.97 -211.042,9.97 -210.362,9.29 -210.362,4.67 -210.712,4.32 -221.302,4.32 -221.71,4.728
+5V on Top Layer "+5V_TarjetaHija" (solid, pour order 72): -479.249,15.32 -479.837,15.908 -479.837,25.988 -479.157,26.668 -474.537,26.668 -474.187,26.318 -474.187,15.728 -474.595,15.32
GND on Top Layer "GND_TarjetaHija" (solid, pour order 74): -479.249,69.07 -479.837,69.658 -479.837,79.738 -479.157,80.418 -474.537,80.418 -474.187,80.068 -474.187,69.478 -474.595,69.07
+3.3V on Top Layer "+3.3V_TarjetaHija" (solid, pour order 76): -479.249,113.174 -479.837,113.762 -479.837,123.842 -479.157,124.522 -474.537,124.522 -474.187,124.172 -474.187,113.582 -474.595,113.174
+5V on Top Layer "+5V_TarjetaHija" (solid, pour order 78): -621.249,15.32 -621.837,15.908 -621.837,25.041 -620.21,26.668 -616.537,26.668 -616.187,26.318 -616.187,15.728 -616.595,15.32
GND on Top Layer "GND_TarjetaHija" (solid, pour order 80): -621.249,69.07 -621.837,69.658 -621.837,79.738 -621.157,80.418 -616.537,80.418 -616.187,80.068 -616.187,69.478 -616.595,69.07
+3.3V on Top Layer "+3.3V_TarjetaHija" (solid, pour order 82): -621.249,113.174 -621.837,113.762 -621.837,123.842 -621.157,124.522 -615.832,124.522 -614.82,123.51 -614.82,114.2 -615.846,113.174
GND on Top Layer "GND_TarjetaHija" (solid, pour order 84): -608.805,72.335 -608.217,72.923 -608.217,83.003 -608.897,83.683 -613.517,83.683 -613.867,83.333 -613.867,72.743 -613.459,72.335
GND on Top Layer "GND_TarjetaHija" (solid, pour order 86): -750.805,72.335 -750.217,72.923 -750.217,83.003 -750.897,83.683 -755.517,83.683 -755.867,83.333 -755.867,72.743 -755.459,72.335
GND on Top Layer "GND_TarjetaHija" (solid, pour order 88): -286.89,153.77 -286.89,157.41 -287.82,158.34 -308.56,158.34 -309.5,157.4 -309.5,153.43 -308.77,152.7 -287.96,152.7
+5V on Top Layer "+5V_TarjetaHija" (solid, pour order 90): -286.786,160.969 -287.374,160.381 -297.454,160.381 -298.25,161.177 -298.25,165.565 -297.784,166.031 -287.194,166.031 -286.786,165.623
+3.3V on Top Layer "+3.3V_TarjetaHija" (solid, pour order 92): -309.754,160.969 -309.166,160.381 -299.086,160.381 -298.34,161.127 -298.34,165.615 -298.756,166.031 -309.346,166.031 -309.754,165.623
GND on Top Layer "GND_TarjetaHija" (solid, pour order 94): -462.647,100.455 -471.648,100.455 -472.578,99.525 -472.578,78.785 -471.638,77.845 -462.613,77.845 -460.52,79.938 -460.52,98.328
+3.3V on Top Layer "+3.3V_TarjetaHija" (solid, pour order 98): -366.169,135.212 -366.757,134.624 -366.757,124.544 -366.427,124.214 -361.74,124.214 -361.107,124.847 -361.107,134.804 -361.515,135.212
GND on Top Layer "GND_TarjetaHija" (solid, pour order 100): -360.451,113.244 -359.863,113.832 -359.863,123.912 -360.609,124.658 -365.097,124.658 -365.513,124.242 -365.513,113.652 -365.105,113.244
+5V on Top Layer "+5V_TarjetaHija" (solid, pour order 102): -366.169,55.532 -366.757,54.944 -366.757,44.864 -366.013,44.12 -362.154,44.12 -361.107,45.167 -361.107,55.124 -361.515,55.532
GND on Top Layer "GND_TarjetaHija" (solid, pour order 104): -360.451,33.564 -359.863,34.152 -359.863,44.232 -360.609,44.978 -365.097,44.978 -365.513,44.562 -365.513,33.972 -365.105,33.564
+5V on Top Layer "Plano_entrada2_+5V" (solid, pour order 112): -5.277,68.835 -6.309,67.804 -14.863,67.804 -18.007,64.659 -32.217,64.659 -39.897,64.659 -40.707,63.849 -43.087,63.849 -43.387,64.149 -43.387,67.339 -42.367,68.359 -42.367,74.698 -40.517,76.548 -6.877,76.548 -5.277,74.948
GND on Top Layer "Plano_entrada2_GND" (solid, pour order 114): -6.857,64.259 -23.317,64.259 -39.707,64.259 -40.767,63.199 -44.077,63.199 -44.947,64.069 -45.827,64.069 -45.837,64.059 -46.657,63.239 -47.877,63.239 -49.797,63.239 -50.817,64.259 -56.507,64.259 -58.157,62.609 -58.157,52.189 -55.977,50.009 -29.732,50.009 -6.637,50.009 -5.357,51.289 -5.357,57.089 -5.357,62.759
VIN33 on Top Layer "Plano +3.3V_TopLayer" (solid, pour order 116): -48.767,69.219 -47.837,69.279 -47.457,68.899 -47.457,63.939 -47.737,63.659 -49.617,63.659 -50.477,64.519 -56.467,64.519 -58.307,66.359 -58.307,78.529 -56.017,80.819 -49.801,80.819 -49.067,80.086 -49.067,77.819 -49.067,69.519
no net on VCC "PLANO VIN" (solid, pour order 32): -29.547,67.788 -38.157,67.788 -39.947,65.998 -40.497,65.448 -44.327,65.448 -47.647,65.448 -48.657,64.438 -48.657,57.548 -47.867,56.758 -29.389,56.758 -28.888,57.259 -28.888,67.129
+2.5V on VCC "+2.5V" (solid, pour order 44): -283.74,26.82 -283.74,30.57 -285.61,32.44 -293.89,40.72 -293.89,47.58 -293.89,58.67 -296.92,61.7 -324.47,61.7 -326.62,59.55 -326.62,20.93 -323.44,17.75 -286.91,17.75 -283.74,20.92
+5V on VCC "+5V" (solid, pour order 106): 0,168 -756.267,168 -756.267,0 0,0
GND on Bottom Layer "GND OSCILADOR" (solid, pour order 36): -542.14,78.88 -542.14,81.13 -541.64,81.63 -538.95,81.63 -538.37,81.05 -538.37,76.66 -538.87,76.16 -538.91,76.16 -540.95,76.16 -542.14,77.35
+3.3V on Bottom Layer "+3.3V Oscilador" (solid, pour order 34): -542.34,80.86 -543.16,81.68 -546.54,81.68 -548.18,80.04 -548.18,72.88 -547.9,72.6 -546.52,71.22 -543.4,71.22 -542.34,72.28
GND on GND "GND" (solid, pour order 46): 0,168 -756.267,168 -756.267,0 0,0
+3.3V on Signal Layer 2 "+3.3V" (solid, pour order 110): 0,168 -756.267,168 -756.267,0 0,0
VIN33 on Signal Layer 1 "VIN33" (solid, pour order 108): 0,168 -756.267,168 -756.267,0 0,0

## Keep-outs
Keep-Out Layer:
  the board outline again, w0.5

## Silkscreen, mask and mechanical layers (free items; w line width, h text height)
Top Overlay:
  drawing of 9141 lines, arcs and shapes, not listed
  text "SLOW ADC 1" at -699.117,127.058 h5
  text "SLOW ADC 2" at -557.137,127.058 h5
  text "FAST ADC" at -428.297,127.058 h5
  text "COMM BOARD" at -310.797,127.058 h5
  text "FIBER OPTIC 1" at -221.877,127.058 h5
  text "FIBER OPTIC 2" at -144.857,127.058 h5
  text "FIBER OPTIC 3" at -67.927,127.058 h5
  text "GND" at -17.117,87.498 h4 r90
  text "+3.3V / SoC" at -17.082,77.968 h4 r90
  text "+5V" at -17.117,69.248 h4 r90
  text "GND" at -17.117,60.128 h4 r90
  text "CARRIER BOARD v1.1" at -343.197,18.198 h3
  text "Project: RTS Usach / Design: Esteban Durán / Guide: David Arancibia & Félix Rojas" at -343.237,12.728 h2

## Dimensions
-756.267,0 to -756.267,168 on Mechanical 1
-756.267,168 to 0,168 on Mechanical 1

## Text inside footprints (layer, text, board x,y; h text height)
C29: Top Overlay "+" at -247.797,42.508 h1.52 r90
C30: Top Overlay "+" at -29.087,102.758 h1.52
C34: Top Overlay "+" at -276.552,18.68 h1.52
C35: Top Overlay "+" at -269.732,18.68 h1.52
C36: Top Overlay "+" at -294.98,21.17 h1.52
C44: Top Overlay "+" at -29.087,65.229 h1.52
C45: Top Overlay "+" at -8.263,48.22 h1.52 r180
C46: Top Overlay "+" at -15.093,48.22 h1.52 r180
C47: Top Overlay "+" at -21.913,48.22 h1.52 r180
C48: Top Overlay "+" at -28.743,48.22 h1.52 r180
C49: Top Overlay "+" at -35.573,48.22 h1.52 r180
C50: Top Overlay "+" at -8.483,118.23 h1.52 r180
C51: Top Overlay "+" at -15.313,118.23 h1.52 r180
C52: Top Overlay "+" at -22.143,118.23 h1.52 r180
C53: Top Overlay "+" at -28.963,118.23 h1.52 r180
C54: Top Overlay "+" at -35.793,118.23 h1.52 r180
D1: Top Overlay "+" at -469.752,136.761 h1.52 r180
D2: Top Overlay "+" at -469.752,139.721 h1.52 r180
D3: Top Overlay "+" at -469.752,142.68 h1.52 r180
D4: Top Overlay "+" at -469.752,145.64 h1.52 r180
D5: Top Overlay "+" at -469.752,148.6 h1.52 r180
D6: Top Overlay "+" at -469.752,151.56 h1.52 r180
D7: Top Overlay "+" at -469.752,154.519 h1.52 r180
D8: Top Overlay "+" at -469.752,157.479 h1.52 r180
JTAG: Top Overlay "2" at -342.458,71.078 h1.52 r90; Top Overlay "1" at -345.138,71.118 h1.52 r90; Mechanical 13 "1" at -345.257,72.788 h1 r90; Mechanical 13 "2" at -342.257,72.788 h1 r90; Mechanical 13 "12" at -342.257,84.748 h1 r90; Mechanical 13 "11" at -345.257,84.748 h1 r90
"JTAG CPLD": Top Overlay "2" at -528.22,86.59 h1.27; Top Overlay "1" at -528.37,84.17 h1.27; Top Overlay "9" at -514.85,84.163 h1.27; Top Overlay "10" at -514.85,86.59 h1.27
P1: Top Overlay "80" at -199.876,13.723 h3; Top Overlay "79" at -199.976,6.023 h3; Top Overlay "2" at -221.676,13.723 h3; Top Overlay "1" at -221.676,6.023 h3
P2: Top Overlay "80" at -199.876,162.107 h3; Top Overlay "79" at -199.976,154.407 h3; Top Overlay "2" at -221.676,162.107 h3; Top Overlay "1" at -221.676,154.407 h3
P3: Top Overlay "80" at -364.41,33.698 h3 r270; Top Overlay "79" at -372.11,33.798 h3 r270; Top Overlay "2" at -364.41,55.498 h3 r270; Top Overlay "1" at -372.11,55.498 h3 r270
P4: Top Overlay "80" at -364.41,113.378 h3 r270; Top Overlay "79" at -374.257,113.511 h3 r270; Top Overlay "2" at -364.41,135.178 h3 r270; Top Overlay "1" at -372.11,135.178 h3 r270
P5: Top Overlay "80" at -462.566,78.725 h3 r270; Top Overlay "79" at -470.266,78.825 h3 r270; Top Overlay "2" at -462.566,100.525 h3 r270; Top Overlay "1" at -470.266,100.525 h3 r270
P6: Top Overlay "80" at -122.876,13.723 h3; Top Overlay "79" at -122.976,6.023 h3; Top Overlay "2" at -144.676,13.723 h3; Top Overlay "1" at -144.676,6.023 h3
P7: Top Overlay "80" at -122.876,162.107 h3; Top Overlay "79" at -122.976,154.407 h3; Top Overlay "2" at -144.676,162.107 h3; Top Overlay "1" at -144.676,154.407 h3
P8: Top Overlay "80" at -45.876,13.723 h3; Top Overlay "79" at -45.976,6.023 h3; Top Overlay "2" at -67.676,13.723 h3; Top Overlay "1" at -67.676,6.023 h3
P9: Top Overlay "80" at -45.876,162.107 h3; Top Overlay "79" at -45.976,154.407 h3; Top Overlay "2" at -67.676,162.107 h3; Top Overlay "1" at -67.676,154.407 h3
P10: Top Overlay "40" at -619.49,15.484 h3 r270; Top Overlay "39" at -627.19,15.584 h3 r270; Top Overlay "2" at -619.49,27.254 h3 r270; Top Overlay "1" at -627.19,27.254 h3 r270
P11: Top Overlay "40" at -619.49,69.234 h3 r270; Top Overlay "39" at -627.19,69.334 h3 r270; Top Overlay "2" at -619.49,81.004 h3 r270; Top Overlay "1" at -627.19,81.004 h3 r270
P12: Top Overlay "40" at -619.49,113.338 h3 r270; Top Overlay "39" at -627.19,113.438 h3 r270; Top Overlay "2" at -619.49,125.108 h3 r270; Top Overlay "1" at -627.19,125.108 h3 r270
P13: Top Overlay "40" at -746.464,72.499 h3 r270; Top Overlay "39" at -754.164,72.599 h3 r270; Top Overlay "2" at -746.464,84.269 h3 r270; Top Overlay "1" at -754.164,84.269 h3 r270
P14: Top Overlay "40" at -477.49,15.484 h3 r270; Top Overlay "39" at -485.19,15.584 h3 r270; Top Overlay "2" at -477.49,27.254 h3 r270; Top Overlay "1" at -485.19,27.254 h3 r270
P15: Top Overlay "40" at -477.49,69.234 h3 r270; Top Overlay "39" at -485.19,69.334 h3 r270; Top Overlay "2" at -477.49,81.004 h3 r270; Top Overlay "1" at -485.19,81.004 h3 r270
P16: Top Overlay "40" at -477.49,113.338 h3 r270; Top Overlay "39" at -485.19,113.438 h3 r270; Top Overlay "2" at -477.49,125.108 h3 r270; Top Overlay "1" at -485.19,125.108 h3 r270
P17: Top Overlay "40" at -604.464,72.499 h3 r270; Top Overlay "39" at -612.164,72.599 h3 r270; Top Overlay "2" at -604.464,84.269 h3 r270; Top Overlay "1" at -612.164,84.269 h3 r270
P19: Top Overlay "80" at -311.237,103.426 h3; Top Overlay "79" at -311.077,110.886 h3; Top Overlay "2" at -287.847,103.186 h3; Top Overlay "1" at -287.637,110.896 h3
P20: Top Overlay "80" at -310.75,155.088 h3; Top Overlay "79" at -310.96,162.558 h3; Top Overlay "2" at -287.82,155.088 h3; Top Overlay "1" at -287.82,163.028 h3
U2: Mechanical 1 "*" at -537.333,64.928 h0.79 r180